# EAGLE board CANFD_HUB (EAGLE 9.6.2)
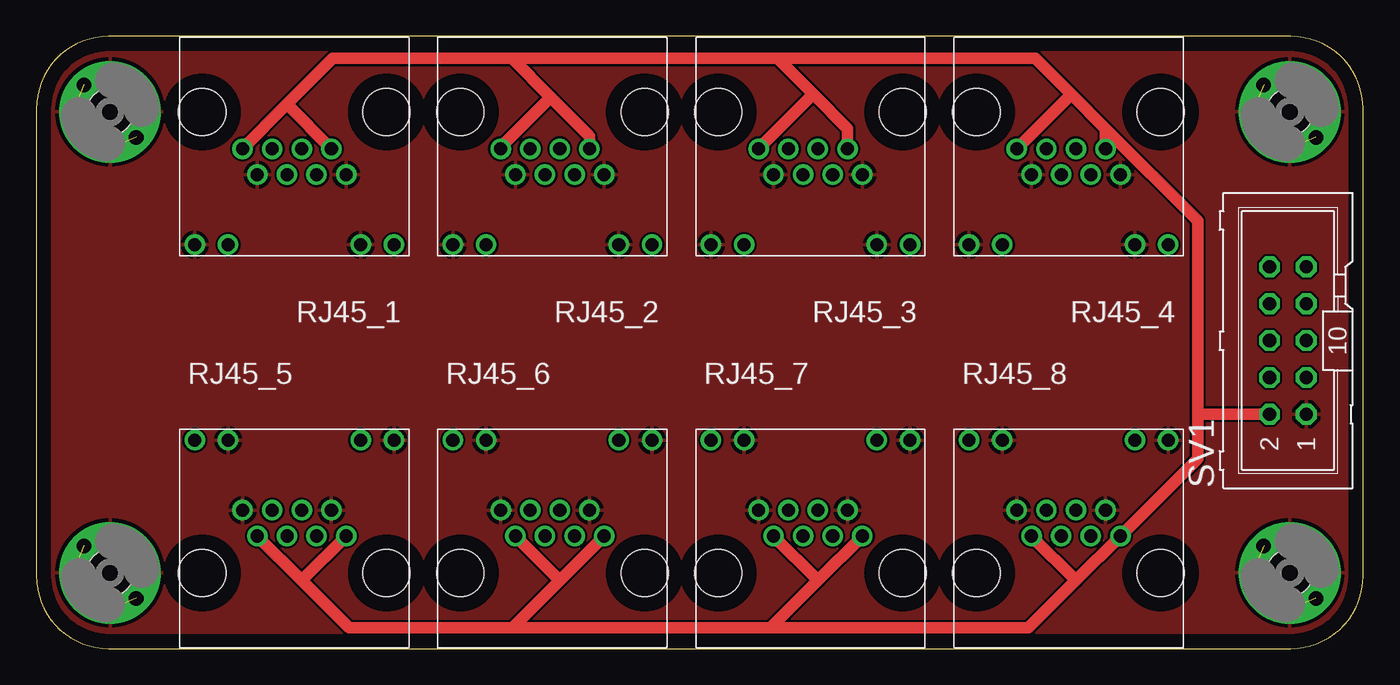
[diagram p0: board, top side]
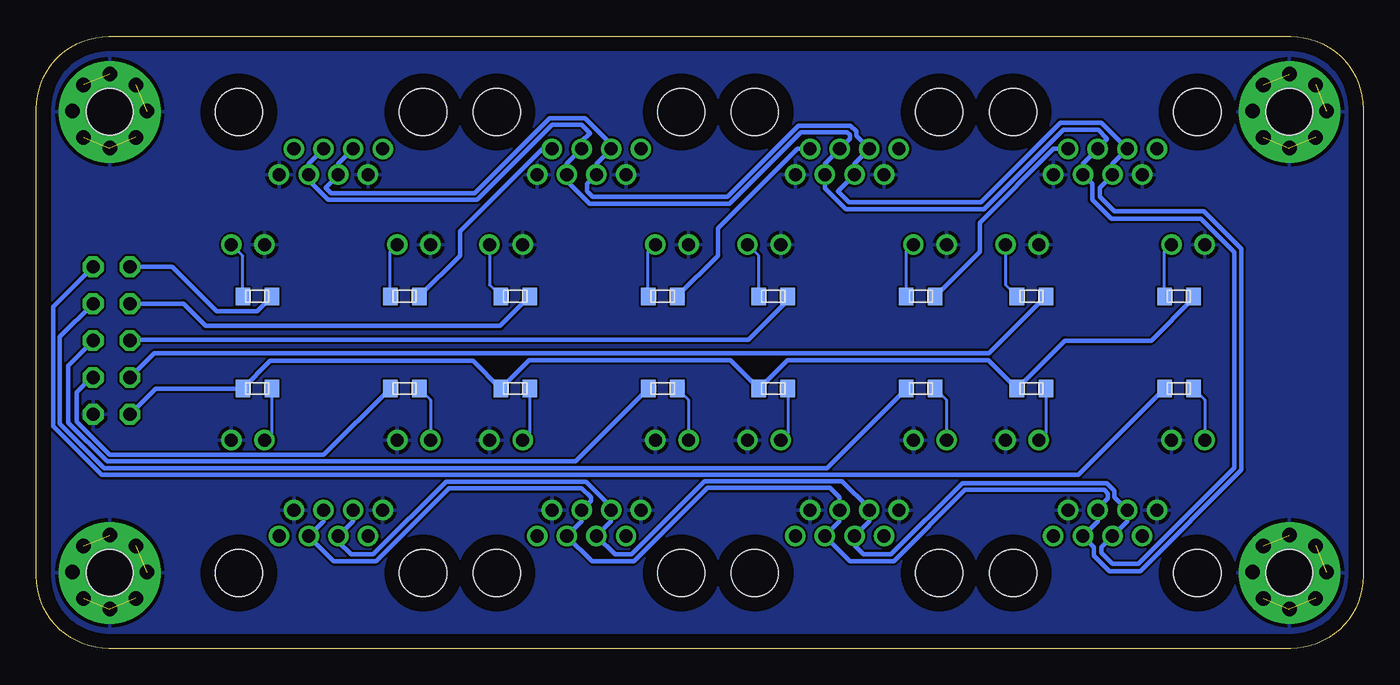
[diagram p1: board, bottom side, seen from below]

Size 91.42 x 42.16 mm. Coordinates in mm from the lower left corner, seen from the top.
Outline: 0,37.16 0,5 arc90 5,0 86.42,0 arc90 91.42,5 91.42,37.16 arc90 86.42,42.16 5,42.16 arc90 0,37.16
Copper layers (1*16): Top 0.035mm / dielectric 1.5mm / Bottom 0.035mm
Design rules "default": minimum track width 6mil, minimum drill 0.35mm, track to track 6mil, track to pad 6mil, pad to pad 6mil, via to via 6mil, smd to smd 6mil, copper to edge 40mil, drill to drill 6mil, minimum pad ring 10mil, minimum via ring 8mil, stop-mask expansion 4mil, vias tented up to drill 0mil, thermal gap 10mil

## Footprints (pad centres in the part's own frame; a part is rotated, then mirrored left to right if it is on the bottom)
3,2 = drill 3.197 pad 7.01: P$1 0,0 | hole 3.2: 0,0
CR0603 = smd 1 x 1.2: LEFT -1,0; RIGHT 1,0
MTJ-88ARX1-LH = drill 0.9: 1 9.92,2.54; 2 8.9,4.32; 3 7.88,2.54; 4 6.86,4.32; 5 5.84,2.54; 6 4.82,4.32; 7 3.8,2.54; 8 2.78,4.32; LED1_A -0.51,9.14; LED1_K 1.78,9.14; LED2_A 10.92,9.14; LED2_K 13.21,9.14 | hole 3.25: 0,0; 12.7,0
ML10 = drill 0.914 octagon: 1 -5.08,-1.27; 2 -5.08,1.27; 3 -2.54,-1.27; 4 -2.54,1.27; 5 0,-1.27; 6 0,1.27; 7 2.54,-1.27; 8 2.54,1.27; 9 5.08,-1.27; 10 5.08,1.27

## Placement (x,y rotation side)
H1  MOUNT-HOLE3.2(NORESIST)  [3,2]  5.08,36.96 0 top
H2  MOUNT-HOLE3.2(NORESIST)  [3,2]  86.36,36.96 0 top
H3  MOUNT-HOLE3.2(NORESIST)  [3,2]  5.08,5.21 0 top
H4  MOUNT-HOLE3.2(NORESIST)  [3,2]  86.36,5.21 0 top
R1  150  [CR0603]  12.7,24.26 0 bottom
R2  150  [CR0603]  30.48,24.26 0 bottom
R3  150  [CR0603]  48.26,24.26 0 bottom
R4  150  [CR0603]  66.04,24.26 0 bottom
R5  150  [CR0603]  22.86,17.91 180 bottom
R6  150  [CR0603]  40.64,17.91 180 bottom
R7  150  [CR0603]  58.42,17.91 180 bottom
R8  150  [CR0603]  76.2,17.91 180 bottom
R9  150  [CR0603]  22.86,24.26 180 bottom
R10  150  [CR0603]  40.64,24.26 180 bottom
R11  150  [CR0603]  58.42,24.26 180 bottom
R12  150  [CR0603]  76.2,24.26 180 bottom
R13  150  [CR0603]  12.7,17.91 0 bottom
R14  150  [CR0603]  30.48,17.91 0 bottom
R15  150  [CR0603]  48.26,17.91 0 bottom
R16  150  [CR0603]  66.04,17.91 0 bottom
RJ45_1  MTJ-88ARX1-LH  [MTJ-88ARX1-LH]  24.13,36.96 180 top
RJ45_2  MTJ-88ARX1-LH  [MTJ-88ARX1-LH]  41.91,36.96 180 top
RJ45_3  MTJ-88ARX1-LH  [MTJ-88ARX1-LH]  59.69,36.96 180 top
RJ45_4  MTJ-88ARX1-LH  [MTJ-88ARX1-LH]  77.47,36.96 180 top
RJ45_5  MTJ-88ARX1-LH  [MTJ-88ARX1-LH]  11.43,5.21 0 top
RJ45_6  MTJ-88ARX1-LH  [MTJ-88ARX1-LH]  29.21,5.21 0 top
RJ45_7  MTJ-88ARX1-LH  [MTJ-88ARX1-LH]  46.99,5.21 0 top
RJ45_8  MTJ-88ARX1-LH  [MTJ-88ARX1-LH]  64.77,5.21 0 top
SV1  [ML10]  86.23,21.21 90 top

## Library data of the parts
H1-H4 = MOUNT-HOLE3.2(NORESIST)
R1-R16 = CR0603
RJ45_1-RJ45_8 = MTJ-88ARX1-LH
SV1 = con-ml; OC_FARNELL: unknown; OC_NEWARK: unknown

## Nets
+5V: R1.RIGHT R2.RIGHT R3.RIGHT R4.RIGHT R5.RIGHT R6.RIGHT R7.RIGHT R8.RIGHT RJ45_1.1 RJ45_1.7 RJ45_2.1 RJ45_2.7 RJ45_3.1 RJ45_3.7 RJ45_4.1 RJ45_4.7 RJ45_5.1 RJ45_5.7 RJ45_6.1 RJ45_6.7 RJ45_7.1 RJ45_7.7 RJ45_8.1 RJ45_8.7 SV1.2
CAN_H+: RJ45_1.5 RJ45_1.6 RJ45_2.5 RJ45_2.6 RJ45_3.5 RJ45_3.6 RJ45_4.5 RJ45_4.6 RJ45_5.5 RJ45_5.6 RJ45_6.5 RJ45_6.6 RJ45_7.5 RJ45_7.6 RJ45_8.5 RJ45_8.6
CAN_L-: RJ45_1.3 RJ45_1.4 RJ45_2.3 RJ45_2.4 RJ45_3.3 RJ45_3.4 RJ45_4.3 RJ45_4.4 RJ45_5.3 RJ45_5.4 RJ45_6.3 RJ45_6.4 RJ45_7.3 RJ45_7.4 RJ45_8.3 RJ45_8.4
GND: H1.P$1 H2.P$1 H3.P$1 H4.P$1 RJ45_1.2 RJ45_1.8 RJ45_1.LED1_K RJ45_1.LED2_K RJ45_2.2 RJ45_2.8 RJ45_2.LED1_K RJ45_2.LED2_K RJ45_3.2 RJ45_3.8 RJ45_3.LED1_K RJ45_3.LED2_K RJ45_4.2 RJ45_4.8 RJ45_4.LED1_K RJ45_4.LED2_K RJ45_5.2 RJ45_5.8 RJ45_5.LED1_K RJ45_5.LED2_K RJ45_6.2 RJ45_6.8 RJ45_6.LED1_K RJ45_6.LED2_K RJ45_7.2 RJ45_7.8 RJ45_7.LED1_K RJ45_7.LED2_K RJ45_8.2 RJ45_8.8 RJ45_8.LED1_K RJ45_8.LED2_K SV1.1
LED1: R9.LEFT SV1.4
LED2: R10.LEFT SV1.6
LED3: R11.LEFT SV1.8
LED4: R12.LEFT SV1.10
LED5: R13.LEFT SV1.9
LED6: R14.LEFT SV1.7
LED7: R15.LEFT SV1.5
LED8: R16.LEFT SV1.3
N$1: R2.LEFT RJ45_2.LED2_A
N$2: R1.LEFT RJ45_1.LED2_A
N$3: R3.LEFT RJ45_3.LED2_A
N$4: R4.LEFT RJ45_4.LED2_A
N$5: R5.LEFT RJ45_5.LED2_A
N$6: R6.LEFT RJ45_6.LED2_A
N$7: R7.LEFT RJ45_7.LED2_A
N$8: R8.LEFT RJ45_8.LED2_A
N$9: R9.RIGHT RJ45_1.LED1_A
N$10: R10.RIGHT RJ45_2.LED1_A
N$11: R11.RIGHT RJ45_3.LED1_A
N$12: R12.RIGHT RJ45_4.LED1_A
N$13: R13.RIGHT RJ45_5.LED1_A
N$14: R14.RIGHT RJ45_6.LED1_A
N$15: R15.RIGHT RJ45_7.LED1_A
N$16: R16.RIGHT RJ45_8.LED1_A

## Tracks (layer width: path | path; a pad name or v marks a point on that pad's centre or on a via)
+5V
  Top 0.8: RJ45_1.1 17.27,37.47 | 17.27,37.47 20.43,40.64 32.77,40.64 | 32.77,40.64 35.43,37.97 | 35.43,37.97 38.11,35.3 RJ45_2.7 | RJ45_2.1 31.99,34.53 35.43,37.97 | 32.77,40.64 51.05,40.64 | RJ45_3.7 55.89,35.8 53.53,38.16 | 51.05,40.64 53.53,38.16 | RJ45_3.1 53.52,38.16 53.53,38.16 | 51.05,40.64 68.83,40.64 71.31,38.16 | 73.67,35.8 RJ45_4.7 | 71.31,38.16 73.67,35.8 | RJ45_4.1 71.3,38.16 71.31,38.16 | RJ45_5.7 18.28,4.69 | 18.28,4.69 21.56,1.42 32.8,1.42 | 32.8,1.42 36.07,4.69 | 36.07,4.69 RJ45_6.1 | RJ45_6.7 36.06,4.69 36.07,4.69 | 32.8,1.42 50.58,1.42 | 50.58,1.42 53.85,4.69 | 53.85,4.69 RJ45_7.1 | RJ45_7.7 53.84,4.69 53.85,4.69 | 50.58,1.42 68.36,1.42 71.64,4.69 | 71.64,4.69 RJ45_8.1 80.01,13.07 80.01,16.13 | RJ45_8.7 71.62,4.69 71.64,4.69 | 73.67,35.8 80.01,29.46 80.01,16.13 | SV1.2 80.01,16.13 | RJ45_1.7 17.28,37.47 17.27,37.47 | RJ45_5.1 18.3,4.69 18.28,4.69
  Bottom 0.3: R1.RIGHT 11.7,24.11 14.61,21.21 20.56,21.21 R5.RIGHT 25.82,19.87 39.68,19.87 R6.RIGHT 43.6,19.87 57.46,19.87 R7.RIGHT 61.32,19.81 75.3,19.81 R8.RIGHT 83.19,17.91 SV1.2 | R2.RIGHT 26.42,27.32 26.42,29.33 21.33,34.42 RJ45_1.7 | R3.RIGHT 44.45,27.07 44.45,28.96 38.99,34.42 RJ45_2.7 | R4.RIGHT 62.23,27.07 62.23,28.74 56.55,34.42 RJ45_3.7
CAN_H+
  Bottom 0.3: RJ45_8.6 69.59,8.77 RJ45_8.5 70.61,7.37 69.72,6.48 68.2,6.48 63.17,11.5 53.54,11.5 51.81,9.77 RJ45_7.6 51.81,8.77 RJ45_7.5 51.56,6.48 50.42,6.48 45.37,11.53 35.9,11.53 34.03,9.65 RJ45_6.6 34.03,8.77 RJ45_6.5 35.05,7.11 34.42,6.48 32.53,6.48 27.63,11.37 17.66,11.37 17.14,10.86 17.14,10.42 RJ45_5.6 16.25,8.77 RJ45_5.5 18.03,6.98 18.03,6.6 17.27,5.84 15.49,5.84 8.89,12.45 8.89,27.3 11.18,29.59 17.36,29.59 18.67,30.9 18.67,32 RJ45_1.6 19.31,33.4 RJ45_1.5 17.65,35.06 17.65,35.11 18.26,35.72 20.67,35.72 26.15,30.24 35.64,30.24 37.09,31.69 RJ45_2.6 37.09,33.4 RJ45_2.5 35.38,35.11 35.38,35.38 35.56,35.56 38.72,35.56 43.65,30.62 53.29,30.62 54.87,32.21 RJ45_3.6 54.87,33.4 RJ45_3.5 53.85,34.92 53.28,35.49 53.86,36.07 55.88,36.07 61.03,30.91 71.31,30.91 72.65,32.26 RJ45_4.6 72.65,33.4 RJ45_4.5
CAN_L-
  Bottom 0.3: RJ45_6.3 | RJ45_6.4 36.07,8.77 RJ45_6.3 | RJ45_6.4 | RJ45_8.4 71.63,8.77 RJ45_8.3 70.93,6.02 68.01,6.02 62.99,11.05 53.85,11.05 53.21,10.41 53.21,10.16 RJ45_7.4 53.85,8.77 RJ45_7.3 53.15,6.02 50.23,6.02 45.18,11.07 36.72,11.07 36.07,10.42 RJ45_6.4 | RJ45_4.3 70.61,33.4 RJ45_4.4 71.5,31.75 71.12,31.37 61.22,31.37 56.07,36.52 53.61,36.52 51.81,34.73 RJ45_3.3 52.83,33.4 RJ45_3.4 53.47,32 53.47,31.5 53.09,31.11 43.8,31.11 38.91,36.01 35.32,36.01 34.92,35.62 34.92,35.31 RJ45_2.3 35.05,33.4 RJ45_2.4 36.2,31.49 35.44,30.73 26.35,30.73 20.87,36.21 18.05,36.21 RJ45_1.3 17.27,33.4 RJ45_1.4 18.16,31.75 18.16,31.11 17.14,30.1 10.97,30.1 8.38,27.52 8.38,12.31 15.36,5.33 17.48,5.33 18.54,6.39 18.54,6.98 RJ45_5.3 18.29,8.77 RJ45_5.4 18.29,9.65 17.6,10.35 17.6,10.67 17.85,10.92 27.44,10.92 32.34,6.02 35.37,6.02 RJ45_6.3
GND  (via drill 1)  (16 unrouted)
  other vias: 2.53,37.02 3.28,35.21 5.08,34.46 6.88,35.21 7.63,37.02 6.88,38.82 5.08,39.57 3.28,38.82 2.53,5.26 3.28,3.46 5.08,2.71 6.88,3.46 7.63,5.26 6.88,7.07 5.08,7.82 3.28,7.07 83.81,5.26 84.56,3.46 86.36,2.71 88.16,3.46 88.91,5.26 88.16,7.07 86.36,7.82 84.56,7.07 83.81,37.02 84.56,35.21 86.36,34.46 88.16,35.21 88.91,37.02 88.16,38.82 86.36,39.57 84.56,38.82
  pour Top: -3.81,45.13 -3.81,-2.41 95.25,-2.41 95.25,45.13
  pour Bottom: -3.81,44.58 -3.81,-2.41 96.52,-2.41 96.52,44.58
LED1
  Bottom 0.3: R9.LEFT 25.8,20.32 83.31,20.32 SV1.4
LED2
  Bottom 0.3: R10.LEFT 39.64,23.99 42.36,21.27 84.91,21.27 SV1.6
LED3
  Bottom 0.3: SV1.8 81.28,23.75 79.76,22.22 59.45,22.22 R11.LEFT
LED4
  Bottom 0.3: R12.LEFT 75.2,24.22 76.19,23.23 78.98,23.23 82.04,26.29 SV1.10
LED5
  Bottom 0.3: SV1.9 90.24,23.55 90.24,15.3 86.92,11.98 19.63,11.98 R13.LEFT
LED6
  Bottom 0.3: SV1.7 89.79,21.46 89.79,15.48 86.73,12.43 36.96,12.43 R14.LEFT
LED7
  Bottom 0.3: SV1.5 89.23,19.49 89.23,15.56 86.55,12.88 54.28,12.88 R15.LEFT
LED8
  Bottom 0.3: SV1.3 87.63,18.67 88.65,17.65 88.65,15.62 86.36,13.34 71.61,13.34 R16.LEFT
N$1
  Bottom 0.2: R2.LEFT 31.48,27.33 RJ45_2.LED2_A
N$2
  Bottom 0.2: R1.LEFT 13.7,27.33 RJ45_1.LED2_A
N$3
  Bottom 0.2: R3.LEFT 49.26,27.33 RJ45_3.LED2_A
N$4
  Bottom 0.2: R4.LEFT 67.04,27.33 RJ45_4.LED2_A
N$5
  Bottom 0.2: R5.LEFT 21.86,14.84 RJ45_5.LED2_A
N$6
  Bottom 0.2: R6.LEFT 39.64,14.84 RJ45_6.LED2_A
N$7
  Bottom 0.2: R7.LEFT 57.42,14.84 RJ45_7.LED2_A
N$8
  Bottom 0.2: R8.LEFT 75.2,14.84 RJ45_8.LED2_A
N$9
  Bottom 0.2: RJ45_1.LED1_A 24.64,25.04 R9.RIGHT
N$10
  Bottom 0.2: R10.RIGHT 41.64,27.04 RJ45_2.LED1_A
N$11
  Bottom 0.2: RJ45_3.LED1_A 60.2,25.04 R11.RIGHT
N$12
  Bottom 0.2: R12.RIGHT 77.2,27.04 RJ45_4.LED1_A
N$13
  Bottom 0.2: R13.RIGHT 10.92,17.13 RJ45_5.LED1_A
N$14
  Bottom 0.2: R14.RIGHT 28.7,17.13 RJ45_6.LED1_A
N$15
  Bottom 0.2: R15.RIGHT 46.48,17.13 RJ45_7.LED1_A
N$16
  Bottom 0.2: R16.RIGHT 64.26,17.13 RJ45_8.LED1_A